# EAGLE board Ekran (EAGLE 9.7.0)
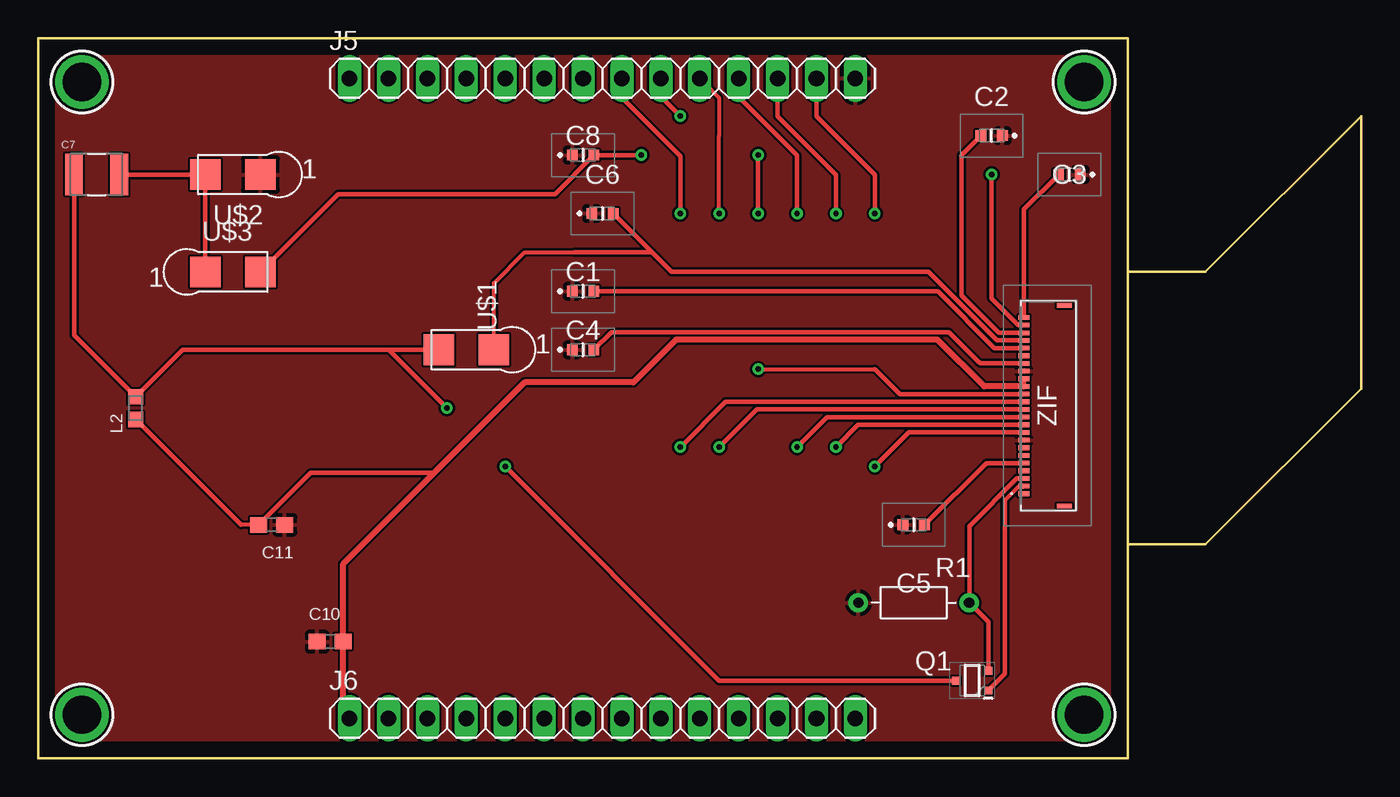
[diagram p0: board, top side]
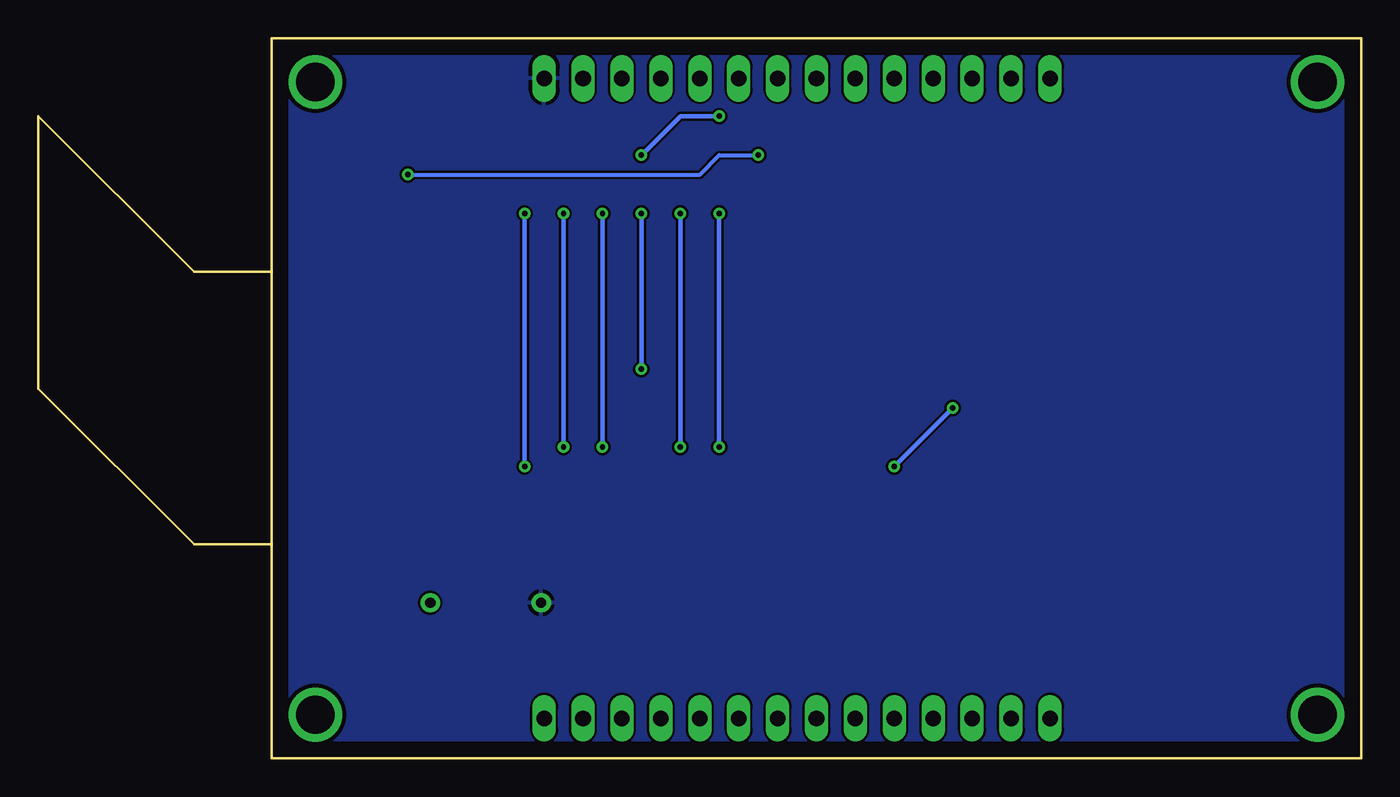
[diagram p1: board, bottom side, seen from below]

Size 86.36 x 46.99 mm. Coordinates in mm from the lower left corner, seen from the top.
Outline: 71.12,31.75 71.12,46.99 0,46.99 0,0 71.12,0 71.12,13.97
Outline: 71.12,31.75 71.12,13.97
Outline: 71.12,31.75 76.2,31.75 86.36,41.91 86.36,24.13 76.2,13.97 71.12,13.97
Copper layers (1*16): Top 0.035mm / dielectric 1.5mm / Bottom 0.035mm
Design rules "default *": minimum track width 10mil, minimum drill 6mil, track to track 6mil, track to pad 6mil, pad to pad 6mil, via to via 6mil, smd to smd 6mil, copper to edge 40mil, drill to drill 15mil, minimum pad ring 10mil, minimum via ring 8mil, stop-mask expansion 4mil, vias tented up to drill 0mil, thermal gap 10mil

## Footprints (pad centres in the part's own frame; a part is rotated, then mirrored left to right if it is on the bottom)
MAJX16 = smd 0.7 x 0.7: 1 -0.7,0; 2 0.7,0
CAPC3225X280N = smd 1.16 x 2.72: 1 -1.475,0; 2 1.475,0
CAPC1608X90 = smd 1.1 x 1: 1 -0.85,0; 2 0.85,0
1X14 = drill 1.016 long: 1 -16.51,0; 2 -13.97,0; 3 -11.43,0; 4 -8.89,0; 5 -6.35,0; 6 -3.81,0; 7 -1.27,0; 8 1.27,0; 9 3.81,0; 10 6.35,0; 11 8.89,0; 12 11.43,0; 13 13.97,0; 14 16.51,0
INDC1608X95N = smd 1 x 0.97: 1 -0.735,0; 2 0.735,0
SOTFL65P210X90-3N = smd 0.51 x 0.52: 1 -1.055,0.65; 2 -1.055,-0.65; 3 1.055,0
RESAD724W46L381D178B = drill 0.66 pad 1.26: 1 -3.62,0; 2 3.62,0
SOD-123FL = smd 2 x 2: 1 -1.8,0; 2 1.8,0
MOUNTINGHOLE_2.5_PLATED = drill 2.5 pad 3.2: P$1 0,0
5034802400 = smd 0.3 x 0.7: 1 -5.75,1.525; 2 -5.25,1.525; 3 -4.75,1.525; 4 -4.25,1.525; 5 -3.75,1.525; 6 -3.25,1.525; 7 -2.75,1.525; 8 -2.25,1.525; 9 -1.75,1.525; 10 -1.25,1.525; 11 -0.75,1.525; 12 -0.25,1.525; 13 0.25,1.525; 14 0.75,1.525; 15 1.25,1.525; 16 1.75,1.525; 17 2.25,1.525; 18 2.75,1.525; 19 3.25,1.525; 20 3.75,1.525; 21 4.25,1.525; 22 4.75,1.525; 23 5.25,1.525; 24 5.75,1.525 | smd 0.3 x 1: MP1 -6.54,-1.125; MP2 6.54,-1.125

## Placement (x,y rotation side)
C1  MAJCT168BB7105KTEA01  [MAJX16]  35.56,30.48 0 top
C2  MAJCT168BB7105KTEA01  [MAJX16]  62.23,40.64 180 top
C3  MAJCT168BB7105KTEA01  [MAJX16]  67.31,38.1 180 top
C4  MAJCT168BB7105KTEA01  [MAJX16]  35.56,26.67 0 top
C5  MAJCT168BB7105KTEA01  [MAJX16]  57.15,15.24 0 top
C6  MAJCT168BB7105KTEA01  [MAJX16]  36.83,35.56 0 top
C7  4.7uF/25V  [CAPC3225X280N]  3.81,38.1 0 top
C8  MAJCT168BB7105KTEA01  [MAJX16]  35.56,39.37 0 top
C10  1uF/6.3V  [CAPC1608X90]  19.05,7.62 0 top
C11  0.1uF/16V  [CAPC1608X90]  15.24,15.24 180 top
J5  PINHD-1X14_1X14M  [1X14]  36.83,44.37 0 top
J6  PINHD-1X14_1X14M  [1X14]  36.83,2.62 0 top
L2  10uH  [INDC1608X95N]  6.35,22.86 90 top
Q1  MCH3478  [SOTFL65P210X90-3N]  60.96,5.08 180 top
R1  0.47R  [RESAD724W46L381D178B]  57.15,10.16 0 top
U$1  SS2040FL  [SOD-123FL]  27.94,26.67 180 top
U$2  SS2040FL  [SOD-123FL]  12.7,38.1 180 top
U$3  SS2040FL  [SOD-123FL]  12.7,31.75 0 top
U$4  MOUNTINGHOLE2.5  [MOUNTINGHOLE_2.5_PLATED]  2.85,44.14 0 top
U$5  MOUNTINGHOLE2.5  [MOUNTINGHOLE_2.5_PLATED]  2.85,2.85 0 top
U$6  MOUNTINGHOLE2.5  [MOUNTINGHOLE_2.5_PLATED]  68.27,44.14 0 top
U$7  MOUNTINGHOLE2.5  [MOUNTINGHOLE_2.5_PLATED]  68.27,2.85 0 top
ZIF  503480-2400  [5034802400]  65.86,23.02 90 top

## Library data of the parts
C1-C6 C8 = MAJCT168BB7105KTEA01; DESCRIPTION: 1uF/25V; HEIGHT: 0.8mm; MANUFACTURER_NAME: TAIYO YUDEN; MANUFACTURER_PART_NUMBER: MAJCT168BB7105KTEA01
C7 = C1210C475K3NACTU; AVAILABILITY: In Stock; CHECK_PRICES: https://www.snapeda.com/parts/C1210C475K3NACTU/KEMET/view-part/?ref=eda; DESCRIPTION: CAPACITOR, 4.7UF, 25V, 1210; Capacitor Application:Automotive Qualified; Dielectric Characteristic:X8L; Capacitance:4.7µF; Capacitance Tolerance:± 10%; Voltage Rating:25V; Capacitor Case Style:1210; Capacitor Mounting:SMD; Operating Temperature Range:-55°C to +150°C; SVHC:No SVHC (20-Jun-2011); External Depth:2.5mm; External Length / Height:2.5mm; External Width:3.2mm; No. of Pins:2; Series:MLCC; Temperature Coefficient:± 15%; MF: KEMET; MP: C1210C475K3NACTU; PACKAGE: 3225 KEMET; PRICE: None; SNAPEDA_LINK: https://www.snapeda.com/parts/C1210C475K3NACTU/KEMET/view-part/?ref=snap
C10 C11 = 06036D105KAT4A; AVAILABILITY: Not in stock; CHECK_PRICES: https://www.snapeda.com/parts/06036D105KAT4A/Kyocera/view-part/?ref=eda; DESCRIPTION: CERAMIC CAPACITOR, 1UF, 6.3V, X5R, 10%, 0603, FULL REEL; Capacitance:1µF; Voltage(DC):6.3V; Capacitor Case / Package:0603 [1608 Metric]; Capacitance Tolerance:± 10%; Dielectric Characteristic:X5R; Product Range:-; Qualification:- RoHS Compliant: Yes; MF: KYOCERA AVX; MP: 06036D105KAT4A; PACKAGE: None; PRICE: None; PURCHASE-URL: https://www.snapeda.com/api/url_track_click_mouser/?unipart_id=12404603&manufacturer=KYOCERA AVX&part_name=06036D105KAT4A&search_term=1uf/6.3v; SNAPEDA_LINK: https://www.snapeda.com/parts/06036D105KAT4A/Kyocera/view-part/?ref=snap
J5 J6 = Tinkercad
L2 = LQM18DN100M70L; AVAILABILITY: In Stock; CHECK_PRICES: https://www.snapeda.com/parts/LQM18DN100M70L/Murata/view-part/?ref=eda; DESCRIPTION: Inductor with Inductance 10uH Tol.+/-20% Package 0603 (1608); MF: Murata Electronics; MP: LQM18DN100M70L; PACKAGE: 0603 Murata; PRICE: None; SNAPEDA_LINK: https://www.snapeda.com/parts/LQM18DN100M70L/Murata/view-part/?ref=snap
Q1 = MCH3478-TL-W; DESCRIPTION: MCH3478-TL-W N-Channel MOSFET, 2 A, 30 V, 3-Pin MCHP ON Semiconductor; HEIGHT: 0.9mm; MANUFACTURER_NAME: onsemi; MANUFACTURER_PART_NUMBER: MCH3478-TL-W; MOUSER_PART_NUMBER: 863-MCH3478-TL-W; MOUSER_PRICE-STOCK: https://www.mouser.co.uk/ProductDetail/ON-Semiconductor/MCH3478-TL-W/?qs=IxCaM9nJKKXCvH6qZaCEBA%3D%3D
R1 = Resistor; CATEGORY: Resistor; SUB-CATEGORY: Fixed
U$1-U$3 = SS2040FL; AVAILABILITY: In Stock; CHECK_PRICES: https://www.snapeda.com/parts/SS2040FL/Panjit/view-part/?ref=eda; DESCRIPTION: Schottky Diodes & Rectifiers GP/TR/13/RoHS/10K/SOD-123FL/SKY/SOD/SSM-20AAFL/SSM20FL-QI02/PJ///; MF: Panjit; MP: SS2040FL; PACKAGE: None; PRICE: None; SNAPEDA_LINK: https://www.snapeda.com/parts/SS2040FL/Panjit/view-part/?ref=snap
U$4-U$7 = microbuilder; BOM: EXCLUDE
ZIF = ZIFF; DESCRIPTION: FFC & FPC Connectors 0.5mm FPC RA SMT Dual Contact 24Ckt; HEIGHT: 1.87mm; MANUFACTURER_NAME: Molex; MANUFACTURER_PART_NUMBER: 503480-2400; MOUSER_PART_NUMBER: 538-503480-2400; MOUSER_PRICE-STOCK: https://www.mouser.co.uk/ProductDetail/Molex/503480-2400?qs=OAhjpuo3Vu7efIoxFh9AOw%3D%3D

## Nets
GND: C1.1 C2.1 C3.1 C4.1 C5.1 C6.1 C8.1 C10.1 C11.1 J5.14 R1.1 U$2.1 ZIF.8 ZIF.17
GPIO1_EPAPER [New Class]: J5.13 ZIF.9
GPIO2_EPAPER: J5.12 ZIF.10
GPIO3_EPAPER [New Class]: J5.11 ZIF.11
N$1 [New Class]: Q1.1 ZIF.2
N$2 [New Class]: C5.2 ZIF.5
N$3 [New Class]: C4.2 ZIF.18
N$5 [New Class]: C7.2 U$2.2 U$3.1
N$12 [New Class]: C7.1 L2.2 Q1.3 U$1.2
N$15 [New Class]: C1.2 ZIF.20
N$16 [New Class]: C6.2 U$1.1 ZIF.21
N$17 [New Class]: C2.2 ZIF.22
N$18 [New Class]: C8.2 U$3.2 ZIF.23
N$19 [New Class]: C3.2 ZIF.24
N$20 [New Class]: Q1.2 R1.2 ZIF.3
POWERSWITCH_3.3V [New Class]: C10.2 C11.2 J6.1 L2.1 ZIF.15 ZIF.16
SPI1_EPAPER [New Class]: J5.10 ZIF.12
SPI2_EPAPER [New Class]: J5.9 ZIF.14
SPI3_EPAPER [New Class]: J5.8 ZIF.13

## Tracks (layer width: path | path; a pad name or v marks a point on that pad's centre or on a via)
GND
  pour Top: 0.08,0.08 71.04,0.08 71.04,46.91 0.08,46.91
  pour Bottom: 0.08,0.08 71.04,0.08 71.04,46.91 0.08,46.91
GPIO1_EPAPER  (via drill 0.35)
  Top 0.305: ZIF.9 56.83,21.27 v54.61,19.05 | v54.61,35.56 54.61,38.1 50.8,41.91 J5.13
  Bottom 0.305: v54.61,19.05 v54.61,35.56
GPIO2_EPAPER  (via drill 0.35)
  Top 0.305: ZIF.10 53.52,21.77 v52.07,20.32 | v52.07,35.56 52.07,38.1 48.26,41.91 J5.12
  Bottom 0.305: v52.07,20.32 v52.07,35.56
GPIO3_EPAPER  (via drill 0.35)
  Top 0.305: ZIF.11 51.48,22.27 v49.53,20.32 | J5.11 45.72,43.18 48.26,40.64 49.53,39.37 v49.53,35.56
  Bottom 0.305: v49.53,20.32 v49.53,35.56
N$1
  Top 0.254: ZIF.2 64.27,17.7 63.96,17.7 63.09,16.84
  Top 0.305: Q1.1 63.09,5.51 63.09,16.84
N$2
  Top 0.305: ZIF.5 61.88,19.27 C5.2
N$3
  Top 0.305: 61.42,25.84 61.41,25.85 | ZIF.18 62.76,25.77 61.49,25.77 61.41,25.85 | 61.41,25.85 59.44,27.82 37.41,27.82 C4.2
N$5
  Top 0.305: U$3.1 U$2.2 C7.2
N$12  (via drill 0.35)
  Top 0.305: 22.86,26.67 9.43,26.67 L2.2 2.34,27.61 C7.1 | 22.86,26.67 U$1.2 | Q1.3 44.45,5.08 v30.48,19.05 | v26.67,22.86 22.86,26.67
  Bottom 0.305: v30.48,19.05 v26.67,22.86
N$15
  Top 0.305: ZIF.20 62.43,26.77 58.72,30.48 C1.2
N$16
  Top 0.254: U$1.1 29.74,31.01 31.75,33.02 34.99,33.02
  Top 0.305: 41.91,31.75 41.34,31.75 | 41.91,31.75 41.34,31.75 | 41.34,31.75 40.36,32.73 | 40.36,32.73 C6.2 | 34.99,33.02 40.07,33.02 40.36,32.73 | ZIF.21 62.58,27.27 58.1,31.75 41.91,31.75
N$17
  Top 0.305: C2.2 60.26,39.37 60.26,30.23 62.03,28.46 62.72,27.77 ZIF.22
N$18  (via drill 0.35)
  Top 0.305: v39.37,39.37 C8.2 33.72,36.83 19.58,36.83 U$3.2 | ZIF.23 63.99,28.27 62.23,30.04 v62.23,38.1
  Bottom 0.254: v62.23,38.1 43.18,38.1 41.91,39.37 v39.37,39.37
N$19
  Top 0.305: ZIF.24 64.34,35.83 C3.2
N$20
  Top 0.254: ZIF.3 63.96,18.27
  Top 0.305: Q1.2 62.02,8.92 R1.2 60.77,15.16 63.88,18.27 63.96,18.27
POWERSWITCH_3.3V
  Top 0.254: ZIF.16 ZIF.15 | C11.2 13.24,15.24
  Top 0.305: C11.2 17.78,18.62 25.82,18.62 | 13.24,15.24 L2.1
  Top 0.381: ZIF.15 61.75,24.27 58.69,27.33 41.64,27.33 38.85,24.54 31.74,24.54 25.82,18.62 19.9,12.7 C10.2 19.9,3.04 J6.1
SPI1_EPAPER  (via drill 0.35)
  Top 0.254: v44.45,35.56 44.45,40.64 44.45,43.1 J5.10
  Top 0.305: ZIF.12 46.9,22.77 v44.45,20.32
  Bottom 0.305: v44.45,20.32 v44.45,35.56
SPI2_EPAPER  (via drill 0.35)
  Top 0.254: v46.99,25.4 54.61,25.4
  Top 0.305: ZIF.14 56.24,23.77 54.61,25.4 | v46.99,35.56 v46.99,39.37 | v41.91,41.91 40.64,43.18 J5.9
  Bottom 0.305: v46.99,25.4 v46.99,35.56 | v46.99,39.37 44.45,41.91 v41.91,41.91
SPI3_EPAPER  (via drill 0.35)
  Top 0.305: J5.8 38.1,43.1 41.91,39.29 v41.91,35.56 | ZIF.13 44.86,23.27 v41.91,20.32
  Bottom 0.305: v41.91,35.56 41.91,26.67 v41.91,20.32